# EAGLE board DFT_v4 (EAGLE 6.5.0)
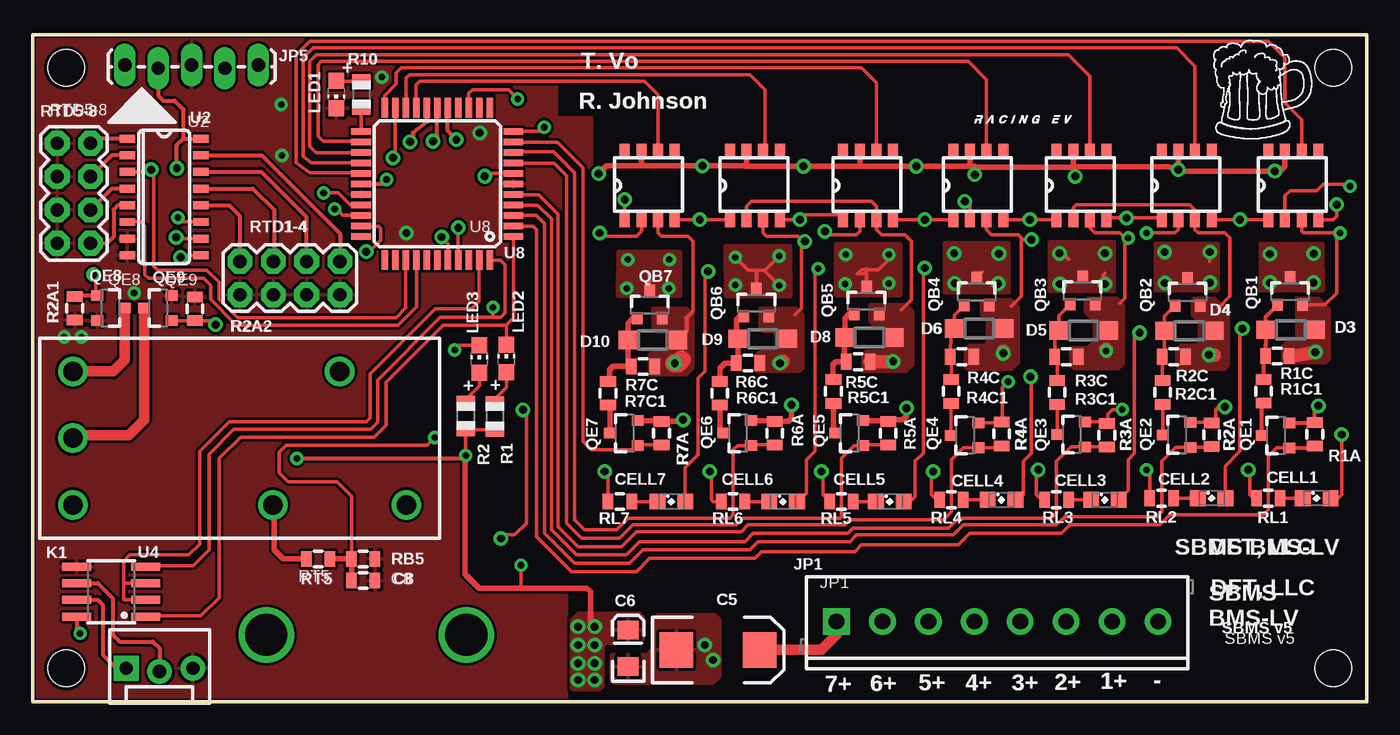
[diagram p0: board, top side]
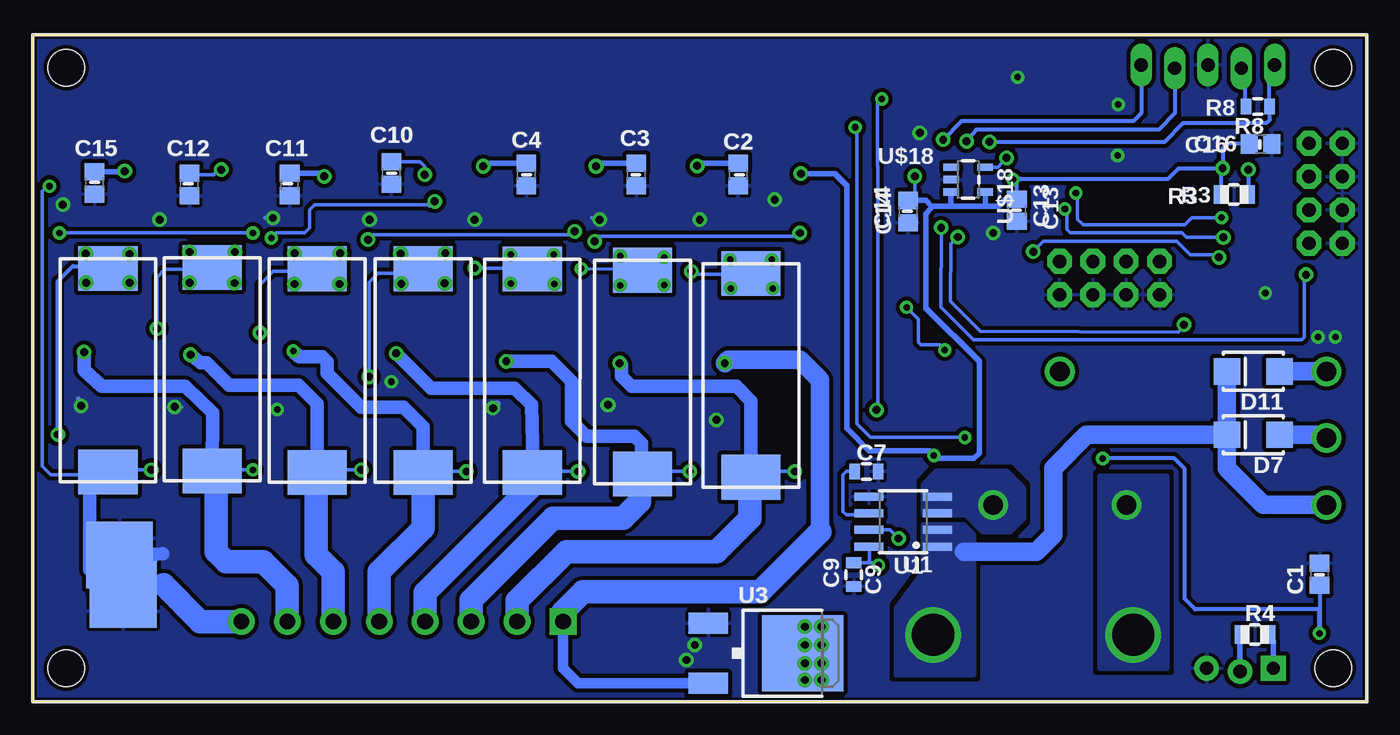
[diagram p1: board, bottom side, seen from below]

Size 101.6 x 50.8 mm. Coordinates in mm from the lower left corner, seen from the top.
Outline: 0,0 101.6,0 101.6,50.8 0,50.8 0,0
Copper layers (1*16): Top 0.035mm / dielectric 1.5mm / Bottom 0.035mm
Design rules "SparkFun": minimum track width 8mil, minimum drill 20mil, track to track 8mil, track to pad 8mil, pad to pad 8mil, via to via 8mil, smd to smd 8mil, copper to edge 10mil, drill to drill 8mil, minimum pad ring 12mil, minimum via ring 10mil, stop-mask expansion 4mil, vias tented up to drill 25mil, thermal gap 10mil
Holes 2.8 mm at 2.54,48.26 99.06,48.26 99.06,2.54 2.54,2.54

## Footprints (pad centres in the part's own frame; a part is rotated, then mirrored left to right if it is on the bottom)
C0805 = smd 1.3 x 1.5: 1 -0.85,0; 2 0.85,0
EIA7343 = smd 2.55 x 2.7: A 3.17,0; C -3.17,0
EIA3216 = smd 1.4 x 1.6: A 1.4,0; C -1.4,0
0805 = smd 0.8 x 1.2: 1 -0.9,0; 2 0.9,0
SML0805 = smd 1.2 x 1.2: A 1.05,0; C -1.05,0
SOD123 = smd 1.4 x 1.4: A 1.9,0; C -1.9,0
SMA-DIODE_ALT = smd 2 x 2: A -2,0; C 2,0
SCREWTERMINAL-3.5MM-8 = drill 1.2 pad 2.032 square: 1 0,0 | drill 1.2 pad 2.032: 2 3.5,0; 3 7,0; 4 10.5,0; 5 14,0; 6 17.5,0; 7 21,0; 8 24.5,0
MOLEX-1X3_LOCK = drill 1.016 pad 1.88 square: 1 0,0.127 | drill 1.016 pad 1.88: 2 2.54,-0.127; 3 5.08,0.127
1X05_LOCK_LONGPADS = drill 1.016 long: 1 0,0; 2 2.54,-0.254; 3 5.08,0; 4 7.62,-0.254; 5 10.16,0
ADJ14024 = drill 1.5: -8-S 0,5.08; -9-R 0,0; C 25.4,-5.08; C+ 0,-5.08; NC 20.32,5.08; NO 15.24,-5.08
CHIP-LED0805 = smd 1.2 x 1.2: A 0,-1.05; C 0,1.05
SOT-23 = smd 0.8 x 0.9: 1 -0.95,-0.23; 2 0.95,-0.23; 3 0,1.87
R0805 = smd 1.1 x 1.4: 1 -1,0; 2 1,0
2X4 = drill 1.016 pad 1.88 octagon: 1 -3.81,-1.27; 2 -3.81,1.27; 3 -1.27,-1.27; 4 -1.27,1.27; 5 1.27,-1.27; 6 1.27,1.27; 7 3.81,-1.27; 8 3.81,1.27
SO-8 = smd 0.61 x 2.21: 1 -1.905,-2.616; 2 -0.635,-2.616; 3 0.635,-2.616; 4 1.905,-2.616; 5 1.905,2.616; 6 0.635,2.616; 7 -0.635,2.616; 8 -1.905,2.616
SO-16 = smd 0.6 x 1.2: 1 -4.445,-2.8; 2 -3.175,-2.8; 3 -1.905,-2.8; 4 -0.635,-2.8; 5 0.635,-2.8; 6 1.905,-2.8; 7 3.175,-2.8; 8 4.445,-2.8; 9 4.445,2.8; 10 3.175,2.8; 11 1.905,2.8; 12 0.635,2.8; 13 -0.635,2.8; 14 -1.905,2.8; 15 -3.175,2.8; 16 -4.445,2.8
V-REG_DPACK = smd 1.6 x 3: 1 -2.28,-4.8; 3 2.28,-4.8 | smd 5.8 x 6.2: 4 0,2.38
TQFP-44 = smd 1.5 x 0.5: 1 -5.8,4; 2 -5.8,3.2; 3 -5.8,2.4; 4 -5.8,1.6; 5 -5.8,0.8; 6 -5.8,0; 7 -5.8,-0.8; 8 -5.8,-1.6; 9 -5.8,-2.4; 10 -5.8,-3.2; 11 -5.8,-4; 23 5.8,-4; 24 5.8,-3.2; 25 5.8,-2.4; 26 5.8,-1.6; 27 5.8,-0.8; 28 5.8,0; 29 5.8,0.8; 30 5.8,1.6; 31 5.8,2.4; 32 5.8,3.2; 33 5.8,4 | smd 0.5 x 1.5: 12 -4,-5.8; 13 -3.2,-5.8; 14 -2.4,-5.8; 15 -1.6,-5.8; 16 -0.8,-5.8; 17 0,-5.8; 18 0.8,-5.8; 19 1.6,-5.8; 20 2.4,-5.8; 21 3.2,-5.8; 22 4,-5.8; 34 4,5.8; 35 3.2,5.8; 36 2.4,5.8; 37 1.6,5.8; 38 0.8,5.8; 39 0,5.8; 40 -0.8,5.8; 41 -1.6,5.8; 42 -2.4,5.8; 43 -3.2,5.8; 44 -4,5.8
SM-5 = smd 3.4 x 4.5: P$1 -7.75,0; P$2 7.75,0
VIRTUALSHORT = smd 2.54 x 5.08: P$1 -1.27,0; P$2 1.27,0
LT1990 = smd 0.762 x 1.143: 1 0,0; 2 1.27,0; 3 2.54,0; 4 3.81,0; 5 3.81,5.207; 6 2.54,5.207; 7 1.27,5.207; 8 0,5.207
SOT23-5 = smd 0.55 x 1.2: 1 -0.95,-1.3; 2 0,-1.3; 3 0.95,-1.3; 4 0.95,1.3; 5 -0.95,1.3

## Placement (x,y rotation side)
C1  .1uF  [C0805]  3.58,9.7 90 bottom
C2  .1uF  [C0805]  47.88,40.13 270 bottom
C3  .1uF  [C0805]  55.63,40.13 270 bottom
C4  .1uF  [C0805]  64.01,40.13 270 bottom
C5  22uF  [EIA7343]  52.2,3.94 0 top
C6  10uF  [EIA3216]  45.34,4.06 90 top
C7  0.1uF  [0805]  38.1,17.53 0 bottom
C8  0.1uF  [0805]  25.17,9.22 0 top
C9  0.1u  [0805]  39.07,9.68 270 bottom
C10  .1uF  [C0805]  74.3,40.26 270 bottom
C11  .1uF  [C0805]  82.04,39.37 270 bottom
C12  .1uF  [C0805]  89.66,39.37 270 bottom
C13  .1uF  [C0805]  26.64,37.41 270 bottom
C14  .1uF  [C0805]  34.92,37.31 270 bottom
C15  .1uF  [C0805]  96.9,39.5 270 bottom
C16  .1uF  [C0805]  8.08,42.47 0 bottom
CELL1  LED  [SML0805]  97.79,15.49 0 top
CELL2  LED  [SML0805]  89.79,15.49 0 top
CELL3  LED  [SML0805]  81.66,15.37 0 top
CELL4  LED  [SML0805]  73.79,15.37 0 top
CELL5  LED  [SML0805]  65.28,15.24 0 top
CELL6  LED  [SML0805]  57.15,15.24 0 top
CELL7  LED  [SML0805]  48.64,15.24 0 top
D3  [SOD123]  95.81,28.32 180 top
D4  [SOD123]  88.09,28.24 180 top
D5  [SOD123]  80.04,28.27 180 top
D6  [SOD123]  72.09,28.42 180 top
D7  [SMA-DIODE_ALT]  8.64,20.32 180 bottom
D8  [SOD123]  63.73,27.74 180 top
D9  [SOD123]  55.6,27.64 180 top
D10  [SOD123]  47.22,27.53 180 top
D11  [SMA-DIODE_ALT]  8.64,25.15 180 bottom
JP1  0532580829  [SCREWTERMINAL-3.5MM-8]  61.21,6.1 0 top
JP2  [MOLEX-1X3_LOCK]  7.11,2.41 0 top
JP5  [1X05_LOCK_LONGPADS]  7.01,48.49 0 top
K1  ADJ14024  [ADJ14024]  3.05,20.07 0 top
LED1  [CHIP-LED0805]  23.11,46.23 180 top
LED2  [CHIP-LED0805]  36.07,26.14 0 top
LED3  [CHIP-LED0805]  34.01,26.09 0 top
QB1  DMP2305U  [SOT-23]  95.77,30.44 0 top
QB2  DMP2305U  [SOT-23]  87.95,30.38 0 top
QB3  DMP2305U  [SOT-23]  79.95,30.49 0 top
QB4  DMP2305U  [SOT-23]  71.9,30.42 0 top
QB5  DMP2305U  [SOT-23]  63.5,29.72 0 top
QB6  DMP2305U  [SOT-23]  55.12,29.57 0 top
QB7  DMP2305U  [SOT-23]  46.99,29.41 0 top
QE1  BSS123  [SOT-23]  95.48,20.27 90 top
QE2  BSS123  [SOT-23]  87.93,20.32 90 top
QE3  BSS123  [SOT-23]  79.91,20.35 90 top
QE4  BSS123  [SOT-23]  71.79,20.28 90 top
QE5  BSS123  [SOT-23]  62.99,20.45 90 top
QE6  BSS123  [SOT-23]  54.48,20.45 90 top
QE7  BSS123  [SOT-23]  45.85,20.45 90 top
QE8  BSS123  [SOT-23]  5.13,29.97 270 top
QE9  BSS123  [SOT-23]  10.34,29.97 90 top
R1  1k  [R0805]  35.18,21.72 270 top
R1A  22k  [0805]  97.64,20.35 90 top
R1C  22k  [0805]  94.8,26.31 0 top
R1C1  1k  [0805]  93.75,23.65 90 top
R2  1k  [R0805]  32.97,21.74 270 top
R2A  22k  [0805]  89.79,20.32 90 top
R2A1  22k  [0805]  3.2,29.95 270 top
R2A2  22k  [0805]  12.34,29.92 90 top
R2C  22k  [0805]  86.91,26.25 180 top
R2C1  2k  [0805]  86.06,23.55 270 top
R3  10k  [R0805]  10.08,38.61 0 bottom
R3A  22k  [0805]  81.8,20.3 90 top
R3C  22k  [0805]  78.73,26.26 180 top
R3C1  2k  [0805]  78.03,23.55 270 top
R4  120  [R0805]  8.51,5.11 0 bottom
R4A  22k  [0805]  73.8,20.39 90 top
R4C  22k  [0805]  70.77,26.27 180 top
R4C1  2k  [0805]  69.95,23.62 270 top
R5A  22k  [0805]  65.15,20.45 90 top
R5C  22k  [0805]  62.87,25.88 180 top
R5C1  2k  [0805]  60.99,23.62 270 top
R6A  22k  [0805]  56.52,20.45 90 top
R6C  22k  [0805]  54.48,25.78 180 top
R6C1  2k  [0805]  52.32,23.5 270 top
R7A  22k  [0805]  47.88,20.45 90 top
R7C  22k  [0805]  46.48,25.53 180 top
R7C1  2k  [0805]  43.81,23.5 270 top
R8  10k  [0805]  8.31,45.31 180 bottom
R10  1k  [R0805]  25.02,46.23 270 top
RB5  5.36k  [0805]  25.17,10.87 180 top
RL1  200  [0805]  94.11,15.49 180 top
RL2  200  [0805]  85.98,15.49 180 top
RL3  200  [0805]  77.98,15.37 180 top
RL4  200  [0805]  69.98,15.37 180 top
RL5  200  [0805]  61.59,15.24 180 top
RL6  200  [0805]  53.34,15.24 180 top
RL7  200  [0805]  44.7,15.24 180 top
RT5  32.4k  [0805]  21.74,10.87 180 top
RTD1-4  M04X2  [2X4]  19.58,32.26 180 top
RTD5-8  M04X2  [2X4]  3.12,38.71 270 top
U1  ACS712  [SO-8]  35.31,13.72 90 bottom
U2  SN74LV4051ADR  [SO-16]  10.01,38.43 270 top
U3  IFX27001TF V50  [V-REG_DPACK]  45.34,3.68 270 bottom
U4  SN75HVD08DR  [SO-8]  5.97,8.38 90 top
U8  PIC18F45K22  [TQFP-44]  30.81,39.42 180 top
U$1  SHUNT  [SM-5]  95.87,25.24 90 bottom
U$2  SHUNT  [SM-5]  87.93,25.31 90 bottom
U$3  SHUNT  [SM-5]  79.94,25.21 90 bottom
U$4  SHUNT  [SM-5]  71.88,25.21 90 bottom
U$5  VIRTUALGROUND  [VIRTUALSHORT]  94.72,8.15 270 bottom
U$6  [B-S]  89.92,42.82 0 top
U$7  VIRTUALGROUND  [VIRTUALSHORT]  95,11.18 270 bottom
U$8  SHUNT  [SM-5]  63.55,25.2 90 bottom
U$9  SHUNT  [SM-5]  55.17,25.1 90 bottom
U$10  SHUNT  [SM-5]  46.89,24.84 90 bottom
U$11  LT1990  [LT1990]  94.11,36.7 0 top
U$12  LT1990  [LT1990]  85.98,36.7 0 top
U$13  LT1990  [LT1990]  77.98,36.7 0 top
U$14  LT1990  [LT1990]  70.1,36.7 0 top
U$15  LT1990  [LT1990]  61.72,36.7 0 top
U$16  LT1990  [LT1990]  53.09,36.7 0 top
U$17  LT1990  [LT1990]  45.09,36.7 0 top
U$18  LM4128CMF-2.0/NOPB  [SOT23-5]  30.35,39.75 270 bottom
U$19  INDPK1  [PICKIT-PIN-1]  8.31,46.66 180 top
U$20  LOGO  [L-MS]  68.71,43.23 0 top

## Library data of the parts
C1-C4 C10-C16 LED1-LED3 R1-R4 R10 = adafruit
C5 C6 R8 = SparkFun-Passives
C7-C9 R1A R1C R1C1 R2A R2A1 R2A2 R2C R2C1 R3A R3C R3C1 R4A R4C R4C1 R5A R5C R5C1 R6A R6C R6C1 R7A R7C R7C1 RB5 RL1-RL7 RT5 = SparkFun
CELL1-CELL7 = led
D3-D6 D8-D10 = diode
D7 D11 = SparkFun-DiscreteSemi
JP1 JP2 JP5 RTD1-4 RTD5-8 = SparkFun-Connectors
K1 U1 U2 U4 U8 U$19 = FSAE Eletric
QB1-QB7 QE1-QE9 U$1-U$5 U$7-U$10 = DFT
U3 = SparkFun-PowerIC; PROD_ID: IC-09888
U$6 U$20 = Pic
U$11-U$17 = Sam_Request
U$18 = SparkFun-PowerIC

## Nets
+5V: C1.1 C2.1 C3.1 C4.1 C6.A C9.1 C10.1 C11.1 C12.1 C13.1 C14.1 C15.1 C16.1 JP5.2 R1.2 R2.2 R3.1 R8.2 U1.8 U2.16 U3.4 U4.8 U8.7 U8.28 U$11.7 U$12.7 U$13.7 U$14.7 U$15.7 U$16.7 U$17.7 U$18.3 U$18.4
A: U2.11 U8.30
AN_CELL1: U8.27 U$11.6
AN_CELL2: U8.26 U$12.6
AN_CELL3: U8.25 U$13.6
AN_CELL4: U8.24 U$14.6
AN_CELL5: U8.22 U$15.6
AN_CELL6: U8.20 U$16.6
AN_CELL7: U8.19 U$17.6
ASEN: U1.7 U8.14
B: U2.10 U8.31
BATTPACK+: D7.C D11.C K1.C+ U1.1 U1.2
BP_ENBL1: QE1.1 R1A.1 U8.2
BP_ENBL2: QE2.1 R2A.1 U8.3
BP_ENBL3: QE3.1 R3A.1 U8.4
BP_ENBL4: QE4.1 R4A.1 U8.5
BP_ENBL5: QE5.1 R5A.1 U8.8
BP_ENBL6: QE6.1 R6A.1 U8.9
BP_ENBL7: QE7.1 R7A.1 U8.10
C: U2.9 U8.32
CELL1V+: D3.C JP1.7 QB1.2 R1C.2 RL2.2 U$2.P$1 U$11.3 U$12.2
CELL1V-: JP1.8 RL1.2 U$1.P$1 U$5.P$1 U$7.P$2 U$11.2
CELL2V+: D4.C JP1.6 QB2.2 R2C.1 RL3.2 U$3.P$1 U$12.3 U$13.2
CELL3V+: D5.C JP1.5 QB3.2 R3C.1 RL4.2 U$4.P$1 U$13.3 U$14.2
CELL4V+: D6.C JP1.4 QB4.2 R4C.1 RL5.2 U$8.P$1 U$14.3 U$15.2
CELL5V+: D8.C JP1.3 QB5.2 R5C.1 RL6.2 U$9.P$1 U$15.3 U$16.2
CELL6V+: D9.C JP1.2 QB6.2 R6C.1 RL7.2 U$10.P$1 U$16.3 U$17.2
CELL7V+: C5.A D10.C JP1.1 QB7.2 R7C.1 U3.3 U$17.3
GND: C1.2 C2.2 C3.2 C4.2 C5.C C6.C C7.2 C8.2 C9.2 C10.2 C11.2 C12.2 C13.2 C14.2 C15.2 C16.2 JP2.3 JP5.3 LED1.C QE1.2 QE2.2 QE3.2 QE4.2 QE5.2 QE6.2 QE7.2 QE8.2 QE9.2 R1A.2 R2A1.2 R2A2.2 R2A.2 R3A.2 R4A.2 R5A.2 R6A.2 R7A.2 RB5.1 RTD1-4.2 RTD1-4.4 RTD1-4.6 RTD1-4.8 RTD5-8.1 RTD5-8.3 RTD5-8.5 RTD5-8.7 U1.5 U2.7 U2.8 U3.1 U4.5 U8.6 U8.29 U$5.P$2 U$7.P$1 U$11.1 U$11.4 U$12.1 U$12.4 U$13.1 U$13.4 U$14.1 U$14.4 U$15.1 U$15.4 U$16.1 U$16.4 U$17.1 U$17.4 U$18.2
IN_OUT: K1.NO RT5.2
INH: U2.6 U8.37
N$1: LED2.A R1.1
N$3: LED3.A R2.1
N$5: D4.A QB2.1 R2C1.1 R2C.2
N$7: D11.A K1.-8-S QE8.3
N$10: JP5.4 U8.17
N$11: QE1.3 R1C1.1
N$12: D5.A QB3.1 R3C1.1 R3C.2
N$13: D6.A QB4.1 R4C1.1 R4C.2
N$14: D3.A QB1.1 R1C1.2 R1C.1
N$15: CELL1.A QB1.3 U$1.P$2
N$17: K1.C U1.3 U1.4
N$18: CELL2.A QB2.3 U$2.P$2
N$19: CELL4.A QB4.3 U$4.P$2
N$20: D7.A K1.-9-R QE9.3
N$21: CELL1.C RL1.1
N$22: QE4.3 R4C1.2
N$23: CELL3.C RL3.1
N$24: R10.2 U8.23
N$25: CELL3.A QB3.3 U$3.P$2
N$26: RTD1-4.1 U2.15
N$27: C7.1 U1.6
N$28: RTD1-4.3 U2.14
N$29: JP2.2 R4.1 U4.6
N$30: RTD1-4.5 U2.13
N$31: RTD1-4.7 U2.12
N$32: CELL2.C RL2.1
N$33: JP2.1 R4.2 U4.7
N$34: CELL4.C RL4.1
N$35: QE2.3 R2C1.2
N$36: QE3.3 R3C1.2
N$39: JP5.5 U8.16
N$42: RTD5-8.2 U2.1
N$44: D8.A QB5.1 R5C1.1 R5C.2
N$45: CELL5.A QB5.3 U$8.P$2
N$46: CELL5.C RL5.1
N$48: QE5.3 R5C1.2
N$50: D9.A QB6.1 R6C1.1 R6C.2
N$51: CELL6.A QB6.3 U$9.P$2
N$52: CELL6.C RL6.1
N$53: D10.A QB7.1 R7C1.1 R7C.2
N$54: QE6.3 R6C1.2
N$55: CELL7.A QB7.3 U$10.P$2
N$56: CELL7.C RL7.1
N$57: QE7.3 R7C1.2
N$58: JP5.1 R8.1 U8.18
N$59: LED1.A R10.1
N$60: RTD5-8.4 U2.2
N$61: RTD5-8.6 U2.4
N$62: RTD5-8.8 U2.5
RSET: QE9.1 R2A2.1 U8.40
RX1: LED2.C U4.1 U8.1
SET: QE8.1 R2A1.1 U8.41
T1: R3.2 U2.3 U8.36
TX1: LED3.C U4.4 U8.44
U4: U4.2 U4.3 U8.43
VEXTERNAL: C8.1 RB5.2 RT5.1 U8.11
VREF-: U8.21 U$18.5

## Tracks (layer width: path | path; a pad name or v marks a point on that pad's centre or on a via)
+5V  (via drill 0.5, 0.6)
  Top 0.254: v71.75,40.13 71.75,40.77 | U8.7 34.63,40.22 v34.42,40.01 | R1.2 32.99,20.72 R2.2 v32.97,18.75 | v37.19,10.39 37.19,8.81 37.36,8.64 | 32.97,18.57 32.92,18.52
  Top 0.305: 24.7,39.37 U8.28 26.62,39.42 v26.95,39.75 | v10.97,40.62 10.97,42.39 11.46,42.88 | 11.46,42.88 U2.16 | U4.8 3.35,5.46 v3.61,5.21 | v20.12,18.52 32.92,18.52 | JP5.2 9.55,46.15 9.93,45.77 10.77,45.77 11.25,45.29 11.28,45.29 11.46,45.11 11.46,42.88
  Top 0.406: 32.92,18.52 32.92,9.7 33.98,8.64 37.36,8.64 42.19,8.64 42.47,8.36 42.47,6.04 v42.8,5.71 | v32.97,18.75 32.97,18.57 | 63.1,40.77 v58.7,40.77 54.2,40.77 | 46.3,41.85 U$17.7 46.35,40.84 46.4,40.8 | U$16.7 54.36,40.92 54.2,40.77 | v43.1,40.2 43.7,40.8 46.4,40.8 | 46.4,40.8 v51,40.8 54.17,40.8 54.2,40.77 | U$15.7 62.99,40.88 63.1,40.77 | 63.1,40.77 v67.3,40.77 71.4,40.77 | 71.4,40.77 71.7,40.77 | 71.7,40.77 71.75,40.77 | U$14.7 71.37,40.79 71.4,40.77 | U$13.7 79.25,40.75 | 79.25,40.75 79.2,40.7 | 79.2,40.7 71.77,40.7 71.7,40.77 | 79.25,40.75 86.51,40.75 v87.25,40.51 | U$12.7 v87.25,40.51 | v79.4,40 79.4,40.5 79.2,40.7 | U$11.7 95.38,40.78 95,40.4 v94.6,40.4 87.64,40.4 v87.25,40.51
  Bottom 0.254: C10.1 72.1,41.11 71.75,40.77 v71.75,40.13 | C12.1 89.5,40.22 89.41,40.13 87.88,40.13 v87.25,40.51 | v34.42,40.01 34.42,38.39 C14.1 | U3.4 42.96,4.16 v42.8,4.32 | U1.8 37.87,11.76 37.87,10.74 38.04,10.58 C9.1 37.37,10.58 v37.19,10.39
  Bottom 0.305: R8.2 9.25,45.31 9.25,47.93 JP5.2 | R3.1 11.08,40.5 v10.97,40.62 | C16.1 10.64,42.47 10.97,42.14 v10.97,40.62 | v20.12,18.52 14.66,18.52 13.87,17.73 13.87,7.85 13.06,7.04 3.61,7.04 v3.61,5.21 3.58,5.23 C1.1 | C13.1 26.64,39.5 | 26.64,39.5 26.64,39.57 26.39,39.83 15.11,39.83 14.33,40.62 v10.97,40.62 | v26.95,39.75 26.92,39.73 26.64,39.5
  Bottom 0.406: C14.1 33.59,38.16 33.15,37.72 | 33.15,37.72 31.62,37.72 | 31.62,37.72 29.08,37.72 | 29.08,37.72 28.07,37.72 27.56,38.23 26.68,38.23 C13.1 | U$18.4 29.05,37.75 29.08,37.72 | U$18.3 31.65,37.75 31.62,37.72 | 33.15,37.72 33.15,37.59 33.58,37.16 33.58,29.97 29.52,25.91 29.52,18.92 29.92,18.52 32.74,18.52 v32.97,18.75 33.32,19.1 37.9,19.1 39.6,20.8 39.6,39.3 40.5,40.2 v43.1,40.2 | C2.1 50.82,40.98 v51,40.8 | C3.1 58.48,40.98 v58.7,40.77 | C4.1 67.08,40.98 v67.3,40.77 | C11.1 79.62,40.22 v79.4,40 | C15.1 94.65,40.35 v94.6,40.4
  other vias: 41.53,5.71 41.53,4.32 41.53,2.92 41.53,1.65 42.8,1.65 42.8,2.92
  pour Top: 41.02,1.02 41.02,6.22 41.53,6.73 46.23,6.73 46.48,6.48 46.48,4.7 46.23,4.45 43.69,4.45 43.43,4.19 43.43,1.14 43.18,0.89 41.15,0.89
A  (via drill 0.5)
  Top 0.254: U2.11 11.38,36.52 v11.05,36.85 | v22.15,38.73 23.27,38.73 24.16,37.85 24.98,37.85 U8.30
  Bottom 0.254: v11.05,36.85 13.31,36.85 13.87,36.3 21.59,36.3 22.02,36.73 22.02,38.61 v22.15,38.73
AN_CELL1
  Top 0.254: U$11.6 96.65,44.32 95.38,45.59 95.38,49.02 94.11,50.29 21.08,50.29 20.07,49.28 20.07,41.02 21.08,40.26 24.72,40.26 U8.27
AN_CELL2
  Top 0.254: U$12.6 88.52,48.39 87.12,49.78 21.34,49.78 20.57,49.02 20.57,41.53 21.21,41.02 24.76,41.02 U8.26
AN_CELL3
  Top 0.254: U$13.6 80.52,47.62 78.87,49.28 21.59,49.28 21.08,48.77 21.08,42.29 21.59,41.78 24.72,41.78 U8.25
AN_CELL4
  Top 0.254: U$14.6 72.64,47.37 71.25,48.77 21.97,48.77 21.72,48.51 21.72,43.05 22.1,42.67 24.96,42.67 U8.24
AN_CELL5
  Top 0.254: U$15.6 64.26,47.12 63.12,48.26 28.07,48.26 27.69,47.88 27.69,47.04 26.8,46.15 26.8,45.23 U8.22
AN_CELL6
  Top 0.254: U$16.6 55.75,42.04 55.75,46.61 54.61,47.75 28.7,47.75 28.45,47.5 28.45,45.26 U8.20
AN_CELL7
  Top 0.254: U$17.6 47.62,46.23 46.61,47.24 29.46,47.24 29.21,46.99 U8.19 | U8.19
ASEN  (via drill 0.5, 0.6)
  Top 0.254: v37.34,22.23 37.59,21.97 37.59,13.59 36.7,12.7 35.94,12.7 v35.66,12.42 | U8.14 33.21,46.32 33.5,46.61 36.22,46.61 v36.93,45.9
  Bottom 0.254: v37.34,22.23 37.21,22.35 37.21,40.77 37.26,40.82 37.26,45.57 v36.93,45.9 | U1.7 36.32,13.08 v35.66,12.42
B  (via drill 0.5, 0.6)
  Top 0.254: U2.10 11.02,35.26 v10.92,35.36 | v22.99,37.52 23.16,37.52 23.6,37.03 25,37.03 U8.31
  Bottom 0.254: v10.92,35.36 13.74,35.36 14.07,35.69 22.55,35.69 22.84,35.97 22.84,37.13 v22.99,37.52
BATTPACK+  (via drill 3.2)
  Bottom 0.406: 10.67,17.78 10.67,19.81 10.41,20.07 10.67,20.32
  Bottom 1.422: K1.C+ 7.87,14.99 10.67,17.78 10.67,20.29 D7.C D11.C | 10.67,20.32 21.34,20.32 23.88,17.78 23.88,12.7 25.15,11.43 30.68,11.4
  other vias: 33.02,5.08
  pour Bottom (no thermals): 29.97,12.7 30.73,13.46 33.78,13.46 33.78,9.91 35.81,7.11 35.81,2.03 29.97,2.03
BP_ENBL1
  Top 0.254: QE1.1 94.76,19.32 94.11,18.67 94.11,14.61 93.73,14.22 86.61,14.22 85.85,13.46 78.99,13.46 78.36,12.83 71.37,12.83 70.48,11.94 63.12,11.94 62.61,11.43 55.5,11.43 54.99,10.92 46.99,10.92 45.97,9.91 41.02,9.91 38.35,12.57 38.35,35.94 38.1,36.2 36.64,36.2 U8.2
  Top 0.305: QE1.1 97.47,19.32 R1A.1
BP_ENBL2
  Top 0.254: R2A.1 89.95,19.37 QE2.1 87.06,19.37 85.98,18.29 85.98,14.48 85.6,14.1 78.61,14.1 77.98,13.46 70.87,13.46 70.1,12.7 62.74,12.7 62.23,12.19 55.24,12.19 54.61,11.56 46.48,11.56 45.47,10.54 41.27,10.54 38.99,12.83 38.99,36.37 38.33,37.03 36.62,37.03 U8.3
BP_ENBL3
  Top 0.254: R3A.1 82.14,19.4 QE3.1 79.09,19.4 77.98,18.29 77.98,14.35 77.6,13.97 70.48,13.97 69.72,13.21 62.48,13.21 62.1,12.83 54.86,12.83 54.23,12.19 46.23,12.19 45.21,11.18 41.4,11.18 39.5,13.08 39.5,36.75 38.46,37.8 36.64,37.8 U8.4
BP_ENBL4
  Top 0.254: R4A.1 73.6,19.33 QE4.1 70.9,19.33 69.98,18.41 69.98,14.48 69.34,13.84 62.23,13.84 61.85,13.46 54.48,13.46 53.98,12.95 45.97,12.95 44.83,11.81 41.53,11.81 40.01,13.34 40.01,37.11 38.51,38.61 36.62,38.61 U8.5
BP_ENBL5
  Top 0.254: R5A.1 63.27,19.55 QE5.1 62.55,19.5 61.59,18.54 61.59,14.1 61.47,13.97 54.1,13.97 53.59,13.46 45.72,13.46 44.7,12.45 41.78,12.45 40.64,13.59 40.64,40.06 39.7,41 36.63,41 U8.8
BP_ENBL6
  Top 0.254: R6A.1 54.76,19.55 QE6.1 53.66,19.5 53.34,19.18 53.34,14.22 53.09,13.97 45.34,13.97 44.45,13.08 42.04,13.08 41.27,13.84 41.27,40.26 39.67,41.86 36.65,41.86 U8.9
BP_ENBL7
  Top 0.254: R7A.1 46.13,19.55 QE7.1 45.76,19.18 42.55,19.18 41.91,19.81 41.91,40.66 39.98,42.6 36.63,42.6 U8.10
C  (via drill 0.6)
  Top 0.254: U2.9 11.4,33.98 v11.25,33.83 | U8.32 | 24.98,36.25 U8.32 | v25.4,34.27 25.63,34.27 26.49,35.13 26.49,36.04 26.34,36.2 25.04,36.2 U8.32
  Bottom 0.254: v11.25,33.83 11.28,33.83 11.48,34.04 13.44,34.04 14.45,35.05 24.61,35.05 v25.4,34.27
CELL1V+  (via drill 0.5, 0.6)
  Top 0.254: RL2.2 85.08,17.41 v84.84,17.65 | U$12.2 87.38,36.7 87.5,36.58 87.38,36.58 U$12.2 | U$11.3 96.65,35.81 96.77,35.69 99.06,35.69 99.31,35.43 | 99.31,35.43 99.31,31.11 98.42,30.23 96.73,30.23 QB1.2 | U$12.2 87.25,35.94 87,35.69 v84.84,35.69 | v99.57,35.69 99.31,35.43
  Top 0.305: 95.73,26.4 R1C.2 | 97.66,28.37 D3.C
  Top 1.016: v97.69,26.62 95.99,26.28 R1C.2
  Bottom 0.254: v84.84,17.65 87.12,17.65 87.57,17.2 | v84.84,35.69 v99.57,35.69
  Bottom 1.016: 87.76,17.39 U$2.P$1 | U$2.P$1 87.91,22 89.99,24.03 96.37,24.03 97.69,25.22 v97.69,26.62 | 87.15,16.78 87.57,17.2 U$2.P$1
  Bottom 1.778: JP1.7 82.21,8.81 84.07,10.67 86.87,10.67 87.63,11.43 87.63,17.26 U$2.P$1
  pour Top (no thermals): 96.24,30.73 97.87,30.76 98.73,29.9 98.73,26.09 98.45,25.81 95.45,25.81 95.25,26.01 95.25,27.05 95.53,27.33 96.11,27.33 96.32,27.53 96.32,30.66
CELL1V-  (via drill 0.5, 0.6)
  Top 0.254: RL1.2 92.96,15.49 92.71,15.75 92.71,17.53 v92.58,17.65 | U$11.2 95.38,38.51 95.78,38.91 97.81,38.91 98.3,39.4 100.18,39.4 v100.33,39.24
  Bottom 0.254: v92.58,17.65 95.71,17.65 U$1.P$1 | v100.33,39.24 100.51,39.24 100.89,38.86 100.89,17.91 100.25,17.27 96.6,17.27 95.94,16.61 95.94,16.76 96.27,17.1
  Bottom 1.016: U$1.P$1 96.27,17.1 97.26,16.11 97.26,10.03 96.62,9.4 U$7.P$2 U$5.P$1 91.64,8.89
  Bottom 1.778: JP1.8 88.85,6.1 91.64,8.89
CELL2V+  (via drill 0.6)
  Top 0.254: RL3.2 76.83,15.37 76.45,15.75 76.45,17.53 v76.58,17.65 | U$13.2 79.25,37.59 79.5,37.85 88.14,37.85 88.52,37.47 U$12.3 88.52,35.94 88.77,35.69 90.81,35.69 91.19,35.31 91.19,30.86 90.3,29.97
  Top 1.016: v89.59,26.42 89.97,26.36 89.99,26.39
  Bottom 0.254: v76.58,17.65 79.75,17.65 U$3.P$1 80.01,17.4
  Bottom 1.016: v89.59,26.42 88.82,25.81 88.37,25.81 86.64,24.08 81.36,24.08 79.94,22.67 U$3.P$1
  Bottom 1.778: JP1.6 78.71,9.88 80.01,11.18 80.01,17.4
  pour Top (no thermals): 88.44,30.71 90.02,30.71 91.06,29.67 91.06,25.58 90.81,25.3 87.5,25.3 87.15,25.63 87.15,26.87 87.43,27.15 88.65,27.15 88.85,27.36 88.85,28.88 88.32,29.41 88.32,30.58
CELL3V+  (via drill 0.5, 0.6)
  Top 0.254: RL4.2 68.83,15.37 68.45,15.75 68.45,17.4 v68.58,17.53 | U$13.3 80.52,36.07 80.9,35.69 82.8,35.69 83.19,35.31 83.19,35.18 | 83.19,35.18 83.19,30.73 82.8,30.35 | U$14.2 71.37,37.72 v70.99,38.1 | v83.44,35.31 83.31,35.31 83.19,35.18
  Top 1.016: v81.76,26.7 81.76,26.8 81.74,26.82
  Bottom 0.254: v68.58,17.53 71.81,17.53 U$4.P$1 | v70.99,38.1 71.25,37.85 | 71.37,37.72 71.25,37.85 | 71.25,37.85 80.14,37.85 80.52,37.47 80.52,36.07 80.9,35.69 83.06,35.69 v83.44,35.31
  Bottom 1.016: 73,16.34 72.23,17.11 U$4.P$1 71.88,20.95 73.36,22.43 76.61,22.43 79.2,25.02 79.2,25.88 79.58,26.26 81.32,26.26 v81.76,26.7
  Bottom 1.778: JP1.5 75.21,9.88 71.88,13.21 71.88,16.76 72.23,17.11
  pour Top (no thermals): 79.07,26.95 80.34,26.95 80.85,27.46 80.85,28.98 80.16,29.67 80.16,30.51 80.39,30.73 82.58,30.73 83.08,30.23 83.08,25.73 82.7,25.35 79.32,25.35 79.07,25.6
CELL4V+  (via drill 0.6)
  Top 0.254: RL5.2 60.2,15.75 60.2,17.4 v60.07,17.53 | 75.31,35.18 75.31,35.31 75.06,35.56 73.03,35.56 72.64,35.94 U$14.3 72.64,36.83 72.39,37.08 | 75.31,35.18 75.31,30.86 74.55,30.1 | U$15.2 62.99,35.81 62.74,35.56 60.58,35.56 v60.33,35.81 | v76.07,35.18 75.31,35.18
  Top 1.016: v73.91,26.52 73.91,26.64 73.94,26.67
  Bottom 0.254: v60.07,17.53 62.87,17.53 63.12,17.78 63.22,17.78 U$8.P$1 | v60.33,35.81 60.58,35.56 75.69,35.56 v76.07,35.18
  Bottom 1.016: v73.91,26.52 71.27,23.88 64.9,23.88 63.63,22.61 63.5,18.16
  Bottom 1.778: JP1.4 71.71,8.3 63.75,16.26 | 63.5,16.51 63.75,16.26 | 63.75,16.26 63.5,17.78 63.5,18.16 U$8.P$1
  pour Top (no thermals): 72.24,30.38 72.24,29.49 72.72,29.01 72.72,27.36 72.52,27.15 71.37,27.15 71.04,26.82 71.04,25.45 71.2,25.3 74.57,25.3 75.08,25.81 75.08,30.05 74.52,30.61 72.47,30.61
CELL5V+  (via drill 0.6)
  Top 0.254: RL6.2 51.82,15.24 51.69,15.37 51.69,17.4 v51.56,17.53 | 66.17,29.84 66.93,30.61 66.93,35.05 66.42,35.56 64.64,35.56 64.26,35.94 U$15.3 64.26,37.72 63.88,38.1 54.74,38.1 54.36,37.72 U$16.2 54.36,36.83
  Top 1.016: R5C.1 65.51,25.88 v65.53,25.91
  Bottom 0.254: v51.56,17.53 54.99,17.53 U$9.P$1
  Bottom 1.016: v65.53,25.91 62.1,25.91 60.58,24.38 60.58,21.34 59.44,20.19 55.75,20.19 55.24,19.68 55.24,17.42 U$9.P$1
  Bottom 1.778: JP1.3 68.21,7.73 61.98,13.97 56.64,13.97 55.37,15.24 55.37,17.14 U$9.P$1
  pour Top (no thermals): 63.75,28.96 63.75,30.23 66.55,30.23 67.06,29.72 67.06,25.65 66.55,25.15 63.25,25.15 63.25,26.42 63.5,26.67 64.77,26.67 65.02,26.92 65.02,28.19 64.77,28.45 64.26,28.45
CELL6V+  (via drill 0.6)
  Top 0.254: RL7.2 43.8,17.28 v43.56,17.53 | U$16.3 55.63,35.69 55.88,35.43 58.29,35.43 58.55,35.18 | 58.55,35.18 58.55,29.97 58.04,29.46 | U$17.2 46.35,35.81 45.97,35.43 43.43,35.43 v43.18,35.69 | v58.8,35.05 58.67,35.05 58.55,35.18
  Top 1.016: v56.9,25.78 57.02,25.78 57.15,25.91
  Bottom 0.254: v43.56,17.53 46.45,17.53 U$10.P$1 | v43.18,35.69 43.43,35.43 58.42,35.43 v58.8,35.05
  Bottom 1.016: U$10.P$1 46.89,22.89 48.01,24 56.01,24 56.77,24.77 56.77,25.65 v56.9,25.78
  Bottom 1.778: JP1.2 64.71,7.68 60.96,11.43 49.53,11.43 46.99,13.97 46.99,16.51 46.74,16.76 46.74,17.19 U$10.P$1
  pour Top (no thermals): 55.37,28.45 55.37,29.97 58.17,29.97 58.67,29.46 58.67,25.4 58.42,25.15 55.12,25.15 55.12,26.42 55.37,26.67 56.39,26.67 56.64,26.92 56.64,27.94 56.39,28.19 55.63,28.19
CELL7V+  (via drill 0.6)
  Top 0.254: U$17.3 47.62,35.69 47.88,35.43 49.91,35.43 50.29,35.05 50.29,29.72 49.91,29.34
  Top 0.305: 50.23,29.65 49.91,29.34 49.78,29.21 49.78,28.2 D10.C
  Top 0.813: C5.A 60.07,3.94 61.21,5.08 JP1.1
  Top 1.422: v48.9,25.78 49.15,25.78 49.4,26.04
  Bottom 0.813: U3.3 60.08,1.4 61.21,2.54 JP1.1
  Bottom 1.422: 41.66,12.95 41.66,24.51 43.18,26.04 48.64,26.04 v48.9,25.78
  Bottom 1.778: JP1.1 61.21,6.86 59.69,8.38 46.23,8.38 41.66,12.95
  pour Top (no thermals): 47.24,28.45 47.24,29.97 49.78,29.97 50.29,29.46 50.29,25.4 49.78,24.89 46.99,24.89 46.99,26.42 47.24,26.67 48.26,26.67 48.51,26.92 48.51,27.94 48.26,28.19 47.5,28.19
GND  (via drill 0.5, 0.6)
  Top 0.254: QE2.2 90.1,21.27 | 90.1,21.27 R2A.2 | R3A.2 82.03,21.3 QE3.2 81.88,21.3 81.89,21.29 81.89,21.87 82.25,22.23 82.96,22.23 v82.98,22.25 | 73.74,21.23 QE4.2 73.81,21.23 73.86,21.29 73.86,23.93 v74.3,24.36 | 73.74,21.23 74.18,21.23 | R4A.2 73.74,21.23 | U$17.1 v45.09,38.23 | U$16.1 v50.8,36.7 U$17.4 | U$16.4 v58.42,36.7 58.8,37.08 61.34,37.08 U$15.1 | U$15.4 v67.94,36.7 U$14.1 | U$14.4 v75.95,36.7 U$13.1 | U$13.4 81.79,36.83 v83.31,36.83 85.72,36.83 U$12.1 | U$12.4 89.79,36.83 | 89.79,36.96 89.79,36.83 | 89.79,36.83 89.92,36.7 v91.95,36.7 U$11.1 | U$11.4 99.06,36.7 99.31,36.96 v99.31,37.85 | 90.1,21.27 90.1,22.23 90.27,22.4 90.75,22.4 v90.81,22.45
  Top 0.305: QE1.2 97.62,21.22 R1A.2 97.64,22.26 v97.92,22.53
  Top 0.406: QE7.2 47.83,21.4 R7A.2 49.41,21.35 v49.53,21.46 | QE6.2 56.47,21.4 R6A.2 57.54,21.35 57.78,21.59 v57.78,22.61 | R5A.2 65.1,21.4 QE5.2 65.34,21.4 65.41,21.46 66.29,21.46 66.55,21.72 v66.55,22.35
  Bottom 0.254: v90.81,22.45 90.3,22.38 90.27,22.4 | U$5.P$2 92.23,10.74 91.69,11.28 | v45.09,38.23 45.21,38.23 | v50.8,36.7 50.8,36.83 | v58.42,36.7 59.05,36.83 | v67.94,36.7 67.94,36.83 | v75.95,36.7 75.95,36.83 | v83.31,36.83 83.95,36.83 | v91.95,36.7 91.95,36.83 | v99.31,37.85 99.19,37.85 | v74.3,24.36 74.3,24.49 | v82.98,22.25 82.98,22.4 82.93,22.45
  Bottom 0.305: v97.92,22.53 97.92,22.86 98.15,23.09
  Bottom 0.406: v49.53,21.46 49.53,21.72 | v57.78,22.61 57.78,22.86 | v66.55,22.35 66.55,22.73 66.17,22.73
  Bottom 1.016: 91.69,11.28 93.22,11.18 U$7.P$1
  other vias: 2.39,27.76 3.71,27.76 7.72,31.11 34.04,43.31 28.45,35.69 51.18,4.32 51.82,3.17 18.92,45.47 18.97,41.58 26.59,47.55
  pour Bottom (isolate 0.318, rank 6): 0,0 101.6,0 101.6,50.8 0,50.8
  pour Top (rank 4): 0,0 40.64,0 40.64,38.1 42.55,38.1 42.55,44.45 39.88,44.45 39.88,50.8 0,50.8
  pour Top: 44.07,3.56 46.74,3.56 47.24,4.06 47.24,6.22 47.62,6.6 51.94,6.6 52.32,6.22 52.32,1.91 51.82,1.4 44.32,1.4 44.07,1.65
IN_OUT  (via drill 3.2)
  Top 0.406: RT5.2 19.05,10.87 18.36,11.56 18.36,14.91 K1.NO
  other vias: 17.78,5.08
  pour Bottom (no thermals): 15.24,2.54 15.24,17.14 20.32,17.14 20.32,2.54
INH
  Top 0.254: U2.6 8.2,36.52 8.53,36.2 8.53,32.51 8.81,32.23 13.03,32.23 13.54,31.73 13.54,30.63 15.49,28.68 27.84,28.68 29.23,30.07 29.23,33.6 U8.37
N$1
  Top 0.254: R1.1 35.18,23.04 36.09,23.95 36.09,25.06 LED2.A
N$3
  Top 0.254: R2.1 32.97,22.99 34.04,24.05 34.04,25.01 LED3.A
N$5
  Top 0.254: QB2.1 86.19,29.34 D4.A 86.19,26.38 R2C.2 86.06,24.4 R2C1.1
N$7
  Top 0.813: QE8.3 7,26.02 6.12,25.15 K1.-8-S
  Bottom 1.422: D11.A K1.-8-S
N$10  (via drill 0.6)
  Top 0.305: v30.48,42.67 30.81,43.08 U8.17
  Bottom 0.305: JP5.4 14.63,44.81 15.82,43.56 29.74,43.56 v30.48,42.67
N$11
  Top 0.305: QE1.3 93.61,22.65 R1C1.1
N$12
  Top 0.254: QB3.1 78.14,29.4 D5.A 77.88,28.01 R3C.2 78.03,26.11 R3C1.1
N$13
  Top 0.254: R4C1.1 69.95,26.24 R4C.2 69.92,28.16 D6.A 70.19,29.43 QB4.1
N$14
  Top 0.305: QB1.1 93.91,29.31 D3.A 93.95,28.28 R1C.1 93.75,26.11 R1C1.2
N$15  (via drill 0.6)
  Top 0.254: CELL1.A 99.44,15.49 99.69,15.75 v99.69,20.34
  Top 0.305: v94.23,34.09 94.28,34.31
  Bottom 0.305: v94.23,34.09 95.1,32.99 U$1.P$2 96.06,33.17 98.55,33.17 99.69,32.03 v99.69,20.34
  other vias: 97.56,34.11 97.54,31.9 94.23,31.9
  pour Top (no thermals): 93.52,34.87 98.22,34.87 98.25,31.29 93.52,31.29
N$17
  pour Bottom (no thermals): 26.16,13.97 26.16,16.26 27.43,17.53 32.77,17.53 33.78,16.51 33.78,14.22 30.48,14.22 29.21,12.95 27.18,12.95
N$18  (via drill 0.6)
  Top 0.254: 89.66,33.53 v89.66,34.24 | 91.97,28.25 v92.13,28.4 91.95,28.22 91.95,19.05 90.84,17.94 CELL2.A
  Top 0.305: v86.21,34.24 86.33,34.04 86.46,34.16
  Bottom 0.254: v92.13,28.4 92.13,32.33 91.54,32.92 88.08,32.92 U$2.P$2
  Bottom 0.305: U$2.P$2 87.18,33.06 v86.21,34.24
  other vias: 86.23,31.88 89.66,31.9
  pour Top (no thermals): 85.52,34.9 90.25,34.9 90.25,31.29 85.52,31.29
N$19  (via drill 0.6)
  Top 0.254: 72.35,32.74 QB4.3 | v70.18,34.14 70.13,34.09 | 70.21,34.14 70.16,34.09 | CELL4.A 75.06,15.37 75.44,15.75 75.44,18.29 76.07,18.92 76.07,24.66 v76,24.74
  Bottom 0.254: U$4.P$2 71.66,32.96 71.09,33.53 v70.18,34.14 | U$4.P$2 71.88,33.46 | 71.88,33.46 71.83,33.5 71.83,33.48 71.96,33.35 | 70.99,34.04 71.4,34.04 71.88,33.55 71.88,33.46 | v76,24.74 76,31.95 75.31,32.64 72.45,32.64 72.35,32.74 72.1,32.74 U$4.P$2
  other vias: 73.58,34.11 70.23,31.85 73.53,31.83
  pour Top (no thermals): 69.44,34.95 74.35,34.95 74.35,31.14 69.44,31.14
N$20
  Top 0.813: QE9.3 8.47,21.45 7.29,20.27 3.25,20.27 K1.-9-R
  Top 1.422: 3.3,20.32 K1.-9-R
  Bottom 1.422: D7.A 3.3,20.32 K1.-9-R
N$21
  Top 0.254: CELL1.C RL1.1
N$22
  Top 0.254: QE4.3 69.92,22.61 R4C1.2
N$23
  Top 0.254: CELL3.C RL3.1
N$24
  Top 0.254: U8.23 R10.2
N$25  (via drill 0.6)
  Top 0.254: v78.21,34.14 78.54,34.06 78.92,33.68 | 81.66,32.61 81.53,32.49 81.53,31.93 v81.66,31.8 | v84.3,28.09 83.92,27.71 83.92,18.9 83.44,18.41 83.44,16.09 CELL3.A
  Bottom 0.254: v78.21,34.14 79.58,32.96 U$3.P$2 80.14,32.77 83.29,32.77 84.3,31.75 v84.3,28.09
  other vias: 81.66,34.14 78.23,31.8
  pour Top (no thermals): 77.44,35.03 82.4,35.03 82.4,31.24 77.44,31.24
N$26
  Top 0.305: U2.15 17.42,41.6 23.39,35.64 RTD1-4.1
N$27
  Bottom 0.254: C7.1 39.62,17.53 39.88,17.27 39.88,14.48 39.62,14.22 38.05,14.22 U1.6
N$28
  Top 0.305: U2.14 17.4,40.34 20.83,36.91 20.83,33.55 RTD1-4.3
N$29
  Top 0.305: U4.6 4.95,9.02 6.1,7.87 6.1,5.08 6.6,4.57 9.14,4.57 9.65,4.06 JP2.2
  Bottom 0.406: R4.1 9.65,5.11 JP2.2
N$30
  Top 0.305: U2.13 16.76,39.06 18.39,37.44 18.39,33.6 RTD1-4.5
N$31
  Top 0.305: U2.12 14.96,37.8 15.77,36.98 RTD1-4.7
N$32
  Top 0.254: CELL2.C RL2.1
N$33
  Top 0.305: U4.7 4.95,7.75 5.33,7.37 5.33,3.56 6.35,2.54 JP2.1
  Bottom 0.406: R4.2 7.11,4.6 JP2.1
N$34
  Top 0.254: CELL4.C RL4.1
N$35
  Top 0.254: QE2.3 86.06,22.69 R2C1.2
N$36
  Top 0.254: R3C1.2 78.03,20.36 QE3.3
N$39  (via drill 0.6)
  Top 0.305: v32.26,42.8 31.6,43.46 31.6,45.13 U8.16
  Bottom 0.305: JP5.5 17.17,44.81 17.78,44.2 30.86,44.2 v32.26,42.8
N$42
  Top 0.305: U2.1 4.75,42.88 RTD5-8.2
N$44
  Top 0.406: QB5.1 62.13,29.49 61.85,29.21 61.85,27.76 D8.A 61.83,26.02 R5C.2 61.19,25.88 60.96,25.65 60.96,24.55 R5C1.1
N$45  (via drill 0.5, 0.6)
  Top 0.254: CELL5.A 66.8,15.24 67.18,15.62 67.18,18.29 67.82,18.92 67.82,32.89 v67.94,33.02 | QB5.3 63.5,32.54 | 63.5,32.54 63.5,32.9 | 63.5,32.9 64.39,32.9 65.05,33.55 65.05,33.88 v65.2,34.04 | 63.5,32.9 63.12,32.9 62.81,32.59 63.45,32.59 63.5,32.54 | 63.5,32.9 U$8.P$2
  Bottom 0.254: v67.94,33.02 63.62,33.02 U$8.P$2 | U$8.P$2 63.55,33.71 63.5,33.76 63.5,33 U$8.P$2 | U$8.P$2 63.5,32.9 64.49,32.9 65,32.38 65,32.05 v65.2,31.85
  other vias: 61.93,34.04 61.87,31.8
  pour Top (no thermals): 61.21,34.8 66.04,34.8 66.04,30.99 61.21,30.99
N$46
  Top 0.254: CELL5.C RL5.1
N$48
  Top 0.406: R5C1.2 60.98,20.58 QE5.3
N$50
  Top 0.406: QB6.1 53.85,29.34 53.59,29.08 53.59,27.74 D9.A 53.7,25.9 R6C.2 52.7,25.78 52.32,25.4 R6C1.1
N$51  (via drill 0.5)
  Top 0.254: CELL6.A 58.29,15.24 58.93,15.88 58.93,18.41 59.56,19.05 59.56,32.64 v59.82,32.97 | QB6.3 55.12,32.61 | 55.12,32.61 55.12,32.79 U$9.P$2 | 53.44,33.88 54.48,32.84 U$9.P$2 | U$9.P$2 55.17,32.66 55.12,32.61 | 54.61,32.84 54.51,32.84 v53.52,33.83 | 55.7,32.84 55.76,32.84 v56.84,33.93 | U$9.P$2 55.7,32.84 | 55.7,32.84 v56.84,31.7
  Bottom 0.254: 55.25,32.77 U$9.P$2 55.7,32.84 v56.84,31.7 | v59.82,32.97 56.82,32.94 56.69,33.12 56.69,33.78 v56.84,33.93
  other vias: 53.52,31.72
  pour Top (no thermals): 52.81,34.65 57.63,34.65 57.66,30.91 52.83,30.91
N$52
  Top 0.254: CELL6.C RL6.1
N$53
  Top 0.406: QB7.1 45.69,29.18 45.34,28.83 45.34,27.55 D10.A 45.32,25.79 R7C.2 44.2,25.53 43.94,25.27 43.94,24.52 R7C1.1
N$54
  Top 0.406: QE6.3 52.58,20.45 52.32,20.7 R6C1.2
N$55  (via drill 0.5, 0.6)
  Top 0.254: CELL7.A 49.69,17.81 50.67,18.8 50.67,24.64 51.18,25.15 51.18,32.51 v51.44,32.77 | QB7.3 46.99,32.49 U$10.P$2
  Bottom 0.254: 51.26,32.59 v51.44,32.77 51.23,32.56 48.72,32.56 48.44,32.28 v48.44,31.47 47.32,32.59 U$10.P$2
  other vias: 45.31,33.66 48.49,33.66 45.24,31.47
  pour Top (no thermals): 44.65,34.21 49.28,34.21 49.25,30.94 44.63,30.94
N$56
  Top 0.254: CELL7.C RL7.1
N$57
  Top 0.406: QE7.3 43.98,22.43 R7C1.2
N$58  (via drill 0.6)
  Top 0.305: U8.18 30.01,44.13 28.96,43.33 28.98,42.88 v28.73,42.62
  Bottom 0.305: v28.73,42.62 15.39,42.65 13.97,44.07 7.62,44.07 7.37,44.32 7.37,45.27 R8.1 7.41,48.09 JP5.1
N$59
  Top 0.254: R10.1 23.16,47.23 LED1.A
N$60
  Top 0.305: U2.2 6.02,41.6 RTD5-8.4
N$61
  Top 0.305: U2.4 6.02,39.06 RTD5-8.6
N$62
  Top 0.305: U2.5 6.48,37.8 6.15,37.47 6.15,35.38 5.61,34.85 4.45,34.85 RTD5-8.8
RSET  (via drill 0.6)
  Top 0.254: QE9.1 R2A2.1 13.78,29.02 v13.92,28.7 | v31.14,35.38 31.65,34.85 31.65,33.66 U8.40
  Bottom 0.254: v13.92,28.7 13.95,28.55 14.35,28.14 29.41,28.19 31.7,30.48 31.67,34.85 v31.14,35.38
RX1
  Top 0.254: U8.1 36.61,29.22 36.04,28.65 | 36.04,28.65 31.24,28.65 26.9,24.31 26.9,21.03 26.01,20.14 15.82,20.14 14.2,18.52 14.2,7.92 12.8,6.53 8.64,6.53 U4.1 | LED2.C 36.07,28.63 36.04,28.65
SET  (via drill 0.6)
  Top 0.254: 4.98,30.95 QE8.1 4.78,31.05 4.78,32.36 v4.62,32.51 | v32.41,36.09 U8.41 | U8.41
  Top 0.305: QE8.1 3.35,30.92 R2A1.1
  Bottom 0.254: v4.62,32.51 4.75,32.38 4.75,27.76 4.95,27.56 29.97,27.56 32.44,30.02 v32.41,36.09
T1  (via drill 0.6)
  Top 0.254: U8.36 28.41,29.98 27.66,29.23 15.6,29.23 14.2,30.63 14.2,31.93 13.23,32.84 9.5,32.84 9.2,33.15 9.2,40.34 v9.02,40.51
  Top 0.305: U2.3 8.84,40.34 v9.02,40.51
  Bottom 0.305: v9.02,40.51 9.02,38.34 R3.2
TX1  (via drill 0.5)
  Top 0.254: U8.44 35.62,33.62 35.97,33.27 35.97,29.62 35.61,29.26 35.23,29.26 | 35.23,29.26 31.04,29.26 26.26,24.49 26.26,21.26 25.73,20.73 15.32,20.73 13.44,18.85 13.44,11.58 12.22,10.36 8.66,10.36 U4.4 | LED3.C 32.49,27.14 v32.13,26.77 | v35.05,30.02 35.05,29.44 35.23,29.26
  Bottom 0.254: v32.13,26.77 32.13,26.8 32.51,27.18 33.96,27.18 34.14,27.36 34.14,29.11 v35.05,30.02
U4
  Top 0.254: U8.43 34.01,30.5 33.43,29.92 30.63,29.92 25.68,24.97 25.68,21.61 25.38,21.31 14.96,21.31 12.7,19.05 12.7,11.99 11.89,11.18 7.39,11.18 6.91,10.69 6.91,9.04 | 6.91,9.04 6.91,7.75 U4.2 | U4.3 6.93,9.02 6.91,9.04
VEXTERNAL  (via drill 0.5)
  Top 0.254: RB5.2 24.27,15.66 23.19,16.74 19.46,16.74 18.77,17.42 18.77,19 19.3,19.53 30.02,19.53 v30.61,20.12 | v38.96,43.74 38.96,43.71 38.68,43.43 36.62,43.43 U8.11
  Top 0.406: RT5.1 RB5.2 C8.1
  Bottom 0.254: v30.61,20.12 37.8,20.12 38.84,21.16 38.84,43.61 v38.96,43.74
VREF-  (via drill 0.6)
  Top 0.254: 27.69,45.3 U8.21 27.61,41.58 v27.43,41.4
  Bottom 0.254: U$18.5 28.11,40.7 v27.43,41.4

## Text on the board
tPlace: T. Vo | R. Johnson | DFT, LLC | SBMS / BMS-LV | 7+ | 6+ | 5+ | 4+ | 3+ | 2+ | 1+ | -
tNames: SBMS v5
_tsilk: JP5 | + | R10 | T. Vo | RTD5-8 | LED1 | R. Johnson | U2 | RTD1-4 | U8 | QE9 | R2A1 | QE8 | QB7 | QB3 | QB2 | QB1 | QB4 | R2A2 | QB6 | QB5 | D5 | D4 | LED3 | LED2 | D10 | D9 | D8 | D6 | D3 | R5C | R1C | + | + | R7C | R6C | R4C | R3C | R2C | R6C1 | R5C1 | R4C1 | R3C1 | R2C1 | R1C1 | QE7 | R7C1 | QE4 | R4A | R3A | QE2 | R2A | QE1 | R2 | R1 | R7A | QE6 | R6A | QE5 | R5A | QE3 | R1A | CELL7 | CELL2 | CELL1 | CELL6 | CELL5 | CELL4 | CELL3 | RL2 | RL7 | RL6 | RL5 | RL4 | RL3 | RL1 | U4 | K1 | RB5 | SBMS BMS-LV | RT5 | JP1 | C8 | C6 | DFT, LLC | C5 | SBMS v5 | 7+ | 6+ | 5+ | 4+ | 3+ | 2+ | 1+ | -
_bsilk: R8 | C3 | C10 | C2 | C4 | C11 | C12 | C16 | U$18 | C15 | C13 | C14 | R3 | D11 | D7 | C7 | C9 | U1 | C1 | U3 | R4